# Altium PCB main.PcbDoc (part 11 of 16)
Units mil, origin at the board's own origin, x right, y up, seen from the top; angles counter-clockwise.
Board outline 8394.75 x 5164.44 mil, 7 copper layers (Top Layer 1, Layer 2, Layer 3, Unused, Layer 4_pow, Layer 5_gnd, Bottom 6+gnd), stack 64.043 mil thick; 364 components, 409 nets, 1932 pads, 1061 vias.
Unrouted connection lines stored in the file: 2.
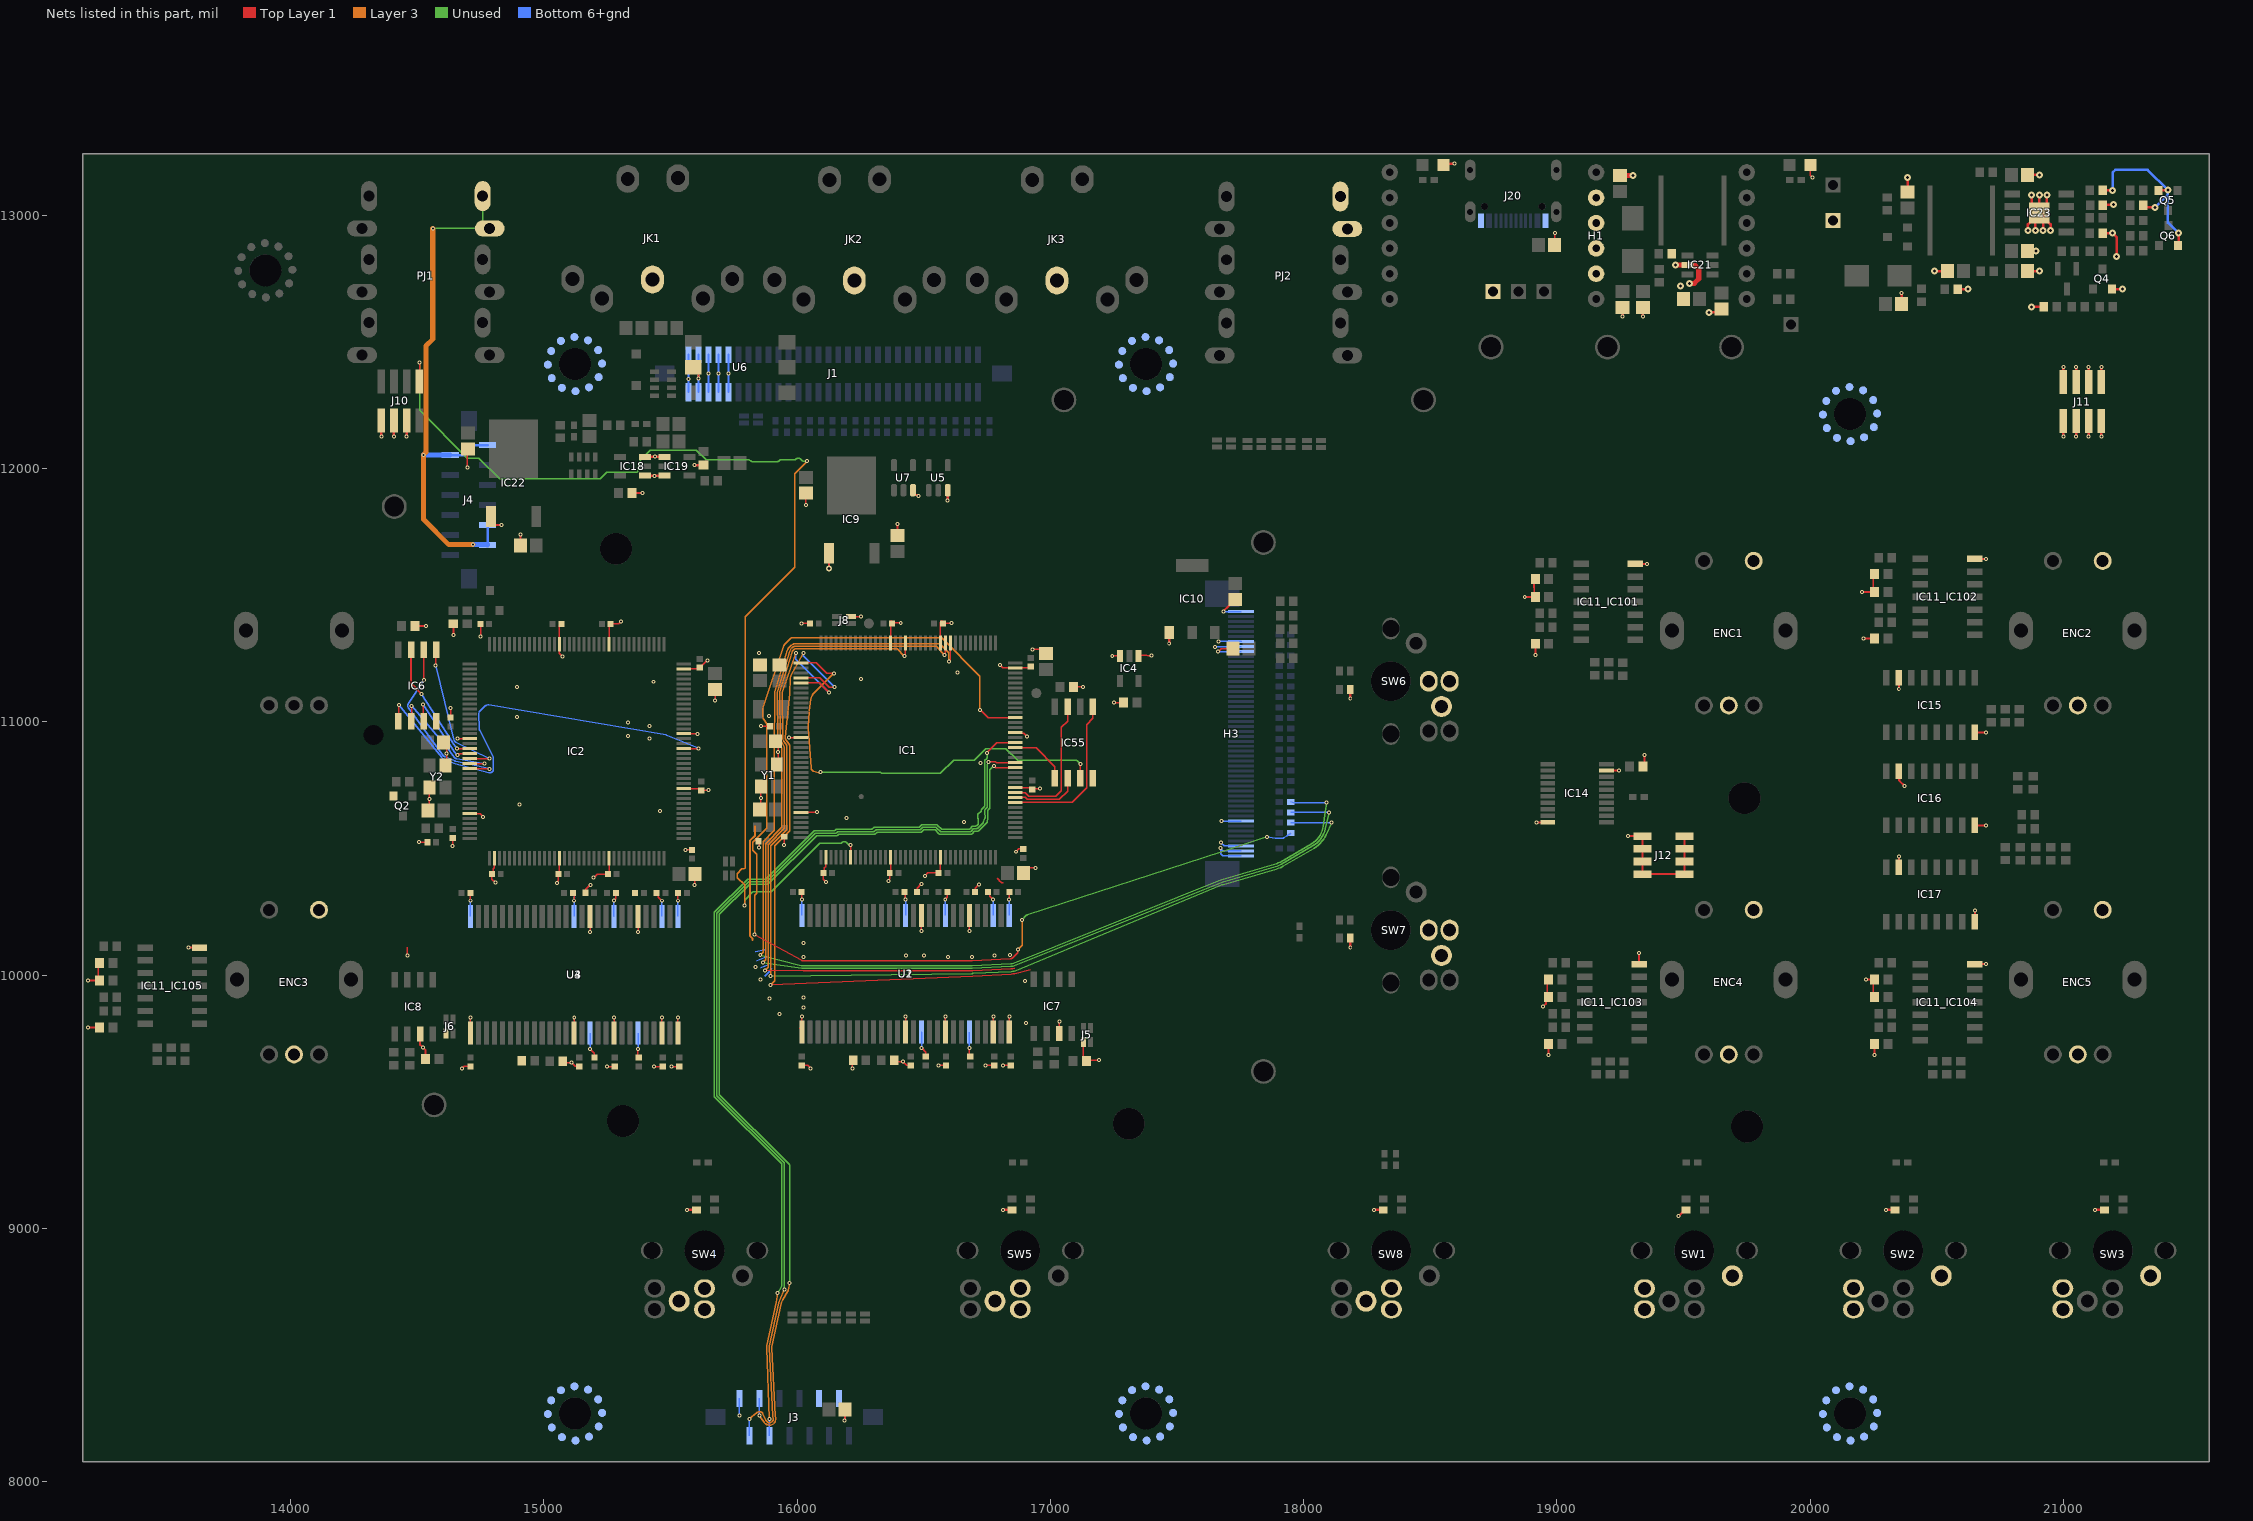
[diagram p14: the nets of this part, all layers, seen from the top]

## Via types
v1: diameter 15.75, hole 7.87, Top Layer 1 to Bottom 6+gnd, tented both sides, 961 vias
v2: diameter 27.56, hole 11.81, Top Layer 1 to Bottom 6+gnd, 45 vias
v3: diameter 23.62/23.62/23.62/23.62/23.62/23.62/23.62 (per signal layer), hole 12, Top Layer 1 to Bottom 6+gnd, tented top, 42 vias
v4: diameter 15.75, hole 7.87, Top Layer 1 to Bottom 6+gnd, 10 vias
v5: diameter 23.62/23.62/23.62/23.62/23.62/23.62/23.62 (per signal layer), hole 12, Top Layer 1 to Bottom 6+gnd, tented bottom, 3 vias

## Nets (pads, with @x,y where several pads share a name; then routed paths per layer and width w, separated by ;. In a path a pad name is that pad's centre, name@x,y a point inside that pad or via, vN(x,y) a via of type N, cw(c..) or ccw(c..) an arc to the next point about the centre after c; other vN are vias at no path point) (continued)
FLASH_CLK_7: IC2.22 IC6.6 | length 753
  Top Layer 1 w5: IC6.6@14525.77,11285.63 14525.77,11165.84 v1(14526.49,11165.12) ; IC2.22@14707.15,10815.73 14707.39,10815.49 14785.63,10815.49 v1(14785.86,10815.26)
  Bottom 6+gnd w5: v1(14526.49,11165.12) 14465.31,11072.28 ccw(c14478.15,11063.82) 14465.77,11054.71 14603.73,10867.17 ccw(c14616.11,10876.28) 14610.24,10862.08 14648.78,10846.14 ccw(c14658.48,10869.59) 14652.96,10844.82 14763.14,10820.25 ; 14763.18,10820.24 v1(14785.86,10815.26)
FLASH_CS_6: IC1.91 IC55.1 | length 235
  Top Layer 1 w5: IC1.91@16860.92,10898.65 16943.32,10898.65 17018.15,10823.82 IC55.1@17018.15,10777.09
FLASH_CS_7: IC2.91 IC6.1 | length 1752.3
  Top Layer 1 w5: IC6.1@14425.77,11002.16 14427.35,11003.74 v1(14427.35,11067.29) ; IC2.91@15552.67,10894.47 15553.06,10894.86 15611.09,10894.86 v1(15611.48,10895.26)
  Bottom 6+gnd w5: v1(14427.35,11067.29) 14596.46,10860.23 ccw(c14616.11,10876.28) 14606.42,10852.83 14644.96,10836.9 ccw(c14658.48,10869.59) 14649.45,10835.39 14781.94,10800.39 ccw(c14785.86,10815.26) 14801.24,10815.26 14801.23,10855.26 ccw(c14785.86,10855.26) 14799.58,10862.21 14746.14,10967.68 cw(c14759.85,10974.63) 14744.48,10974.27 14743.27,11032.34 cw(c14758.64,11032.66) 14748.25,11043.99 14769.39,11063.37 cw(c14779.77,11052.03) 14782.33,11067.19 15482.6,10948.9 cw(c15479.93,10933.76) 15485.87,10947.94 v1(15611.48,10895.26)
FLASH_D0_6: IC1.80 IC55.5 | length 637.8
  Top Layer 1 w5: IC1.80@16860.91,10682.13 17086.46,10682.13 17144.05,10739.71 17144.05,10989.71 17168.15,11013.82 IC55.5@17168.15,11060.55
FLASH_D0_7: IC2.20 IC6.5 | length 604.6
  Top Layer 1 w5: v1(14573.15,11223.82) 14573.15,11283.01 IC6.5@14575.77,11285.63 ; IC2.20@14707.15,10855.1 14707.23,10855.18 14785.78,10855.18 v1(14785.86,10855.26)
  Bottom 6+gnd w5: v1(14573.15,11223.82) 14645.07,10930.97 ccw(c14659.99,10934.67) 14653.18,10920.89 v1(14785.86,10855.26)
FLASH_D1_6: IC1.81 IC55.2 | length 274.5
  Top Layer 1 w5: IC1.81@16860.91,10701.81 16901.36,10701.81 16909.05,10694.12 17035.94,10694.12 17068.15,10726.33 IC55.2@17068.15,10777.09
FLASH_D1_7: IC2.21 IC6.2 | length 509.9
  Top Layer 1 w5: IC6.2@14475.77,11002.16 14478.15,11004.54 v1(14478.15,11063.82) ; IC2.21@14707.15,10835.42 14707.23,10835.34 14766.41,10835.34 v1(14766.48,10835.26)
  Bottom 6+gnd w5: v1(14478.15,11063.82) 14627.86,10886.19 cw(c14616.11,10876.28) 14628.67,10885.15 14645.92,10860.72 ccw(c14658.48,10869.59) 14655.85,10854.44 v1(14766.48,10835.26)
FLASH_D2_6: IC1.1 IC55.3 | length 1751.4
  Top Layer 1 w5: IC1.1@16015.39,11233.31 16074.77,11233.31 16116.24,11191.83 v1(16145.24,11191.83) ; IC55.3@17118.15,10777.09 17118.15,10834.31 v1(17118.23,10834.39)
  Unused w5: v1(16092.24,10801.51) 16326.62,10801.51 cw(c16326.62,10796.51) 16330.14,10800.06 16331.56,10798.64 ccw(c16335.07,10802.2) 16335.07,10797.2 16564.46,10797.2 ccw(c16564.46,10802.2) 16567.98,10798.65 16616.4,10847.07 cw(c16619.92,10843.51) 16619.92,10848.51 16695.54,10848.51 ccw(c16695.54,10853.51) 16698.62,10849.58 16706.94,10856.09 ccw(c16703.86,10860.03) 16707.38,10856.48 16743.27,10892.37 cw(c16746.79,10888.82) 16746.79,10893.82 16822.94,10893.82 cw(c16822.94,10888.82) 16826.46,10892.37 16869.35,10849.97 ccw(c16872.88,10853.51) 16872.88,10848.51 17102.04,10848.51 cw(c17102.04,10843.51) 17105.57,10847.05 v1(17118.23,10834.39)
  Layer 3 w5: 16048.08,11041.22 16043.91,10981.06 ccw(c16079.21,10978.64) 16043.92,10976.15 16055.02,10818.72 ccw(c16070.35,10819.85) 16065.59,10805.23 16090.24,10797.2 16090.24,10799.5 v1(16092.24,10801.51) ; 16048.32,11043.65 16054.06,11090.1 cw(c16089.16,11085.73) 16064.1,11110.69 v1(16145.24,11191.83)
FLASH_D2_7: IC2.19 IC6.3 | length 364.3
  Top Layer 1 w5: v1(14523.15,11068.82) 14523.15,11004.79 IC6.3@14525.77,11002.16 ; v1@14656.02,10864.22 14666.59,10874.79 IC2.19@14707.15,10874.79
  Bottom 6+gnd w5: v1(14523.15,11068.82) 14643.66,10886.77 ccw(c14656.48,10895.26) 14644.9,10885.15 v1(14658.48,10869.59)
FLASH_D3_6: IC1.82 IC55.7 | length 539.2
  Top Layer 1 w5: IC1.82@16860.91,10721.5 16900.95,10721.5 16915.24,10707.2 17021.54,10707.2 17043.15,10728.82 17043.15,10978.82 17068.15,11003.82 IC55.7@17068.15,11060.55
FLASH_D3_7: IC2.18 IC6.7 | length 499.7
  Top Layer 1 w5: v1(14656.48,10895.26) 14656.88,10894.86 14706.76,10894.86 IC2.18@14707.15,10894.47
  Top Layer 1 w8: IC6.7@14475.77,11285.63 14475.77,11151.91 v1(14516.58,11111.09)
  Bottom 6+gnd w5: v1(14516.58,11111.09) 14638.64,10920.97 ccw(c14659.99,10934.67) 14639.16,10920.2 v1(14656.48,10895.26)
FMC_A21_RS: IC1.4 | length 2737
  Top Layer 1 w5: v1(15895.24,9962.2) 16693.51,9996.9 ; IC1.4@16015.39,11174.25 16089.27,11174.25 16126.03,11137.5 v1(16148.55,11137.5) ; 16921.06,10021.37 ccw(c16922.44,10014) 16920.68,10021.29 16858.7,10006.66 cw(c16841.4,10080.02) 16845.35,10004.75 16694.1,9996.93 ; 16693.51,9996.9 ccw(c16690.24,10072.2) 16694.1,9996.93 ; 16693.51,9996.9 ccw(c16690.24,10072.2) 16694.1,9996.93 ; 16693.51,9996.9 ccw(c16690.24,10072.2) 16694.1,9996.93 ; 16693.51,9996.9 ccw(c16690.24,10072.2) 16694.1,9996.93 ; 16693.51,9996.9 ccw(c16690.24,10072.2) 16694.1,9996.93 ; 16693.51,9996.9 ccw(c16690.24,10072.2) 16694.1,9996.93 ; 16693.51,9996.9 ccw(c16690.24,10072.2) 16694.1,9996.93 ; 16693.51,9996.9 ccw(c16690.24,10072.2) 16694.1,9996.93 ; 16693.51,9996.9 ccw(c16690.24,10072.2) 16694.1,9996.93 ; 16693.51,9996.9 ccw(c16690.24,10072.2) 16694.1,9996.93 ; 16693.51,9996.9 ccw(c16690.24,10072.2) 16694.1,9996.93 ; 16693.51,9996.9 ccw(c16690.24,10072.2) 16694.1,9996.93 ; 16693.51,9996.9 ccw(c16690.24,10072.2) 16694.1,9996.93 ; 16693.51,9996.9 ccw(c16690.24,10072.2) 16694.1,9996.93 ; 16693.51,9996.9 ccw(c16690.24,10072.2) 16694.1,9996.93 ; 16693.51,9996.9 ccw(c16690.24,10072.2) 16694.1,9996.93
  Layer 3 w5: v1(15895.24,9962.2) 15910.95,9977.91 15910.95,10512.06 15970.02,10571.13 15970.02,10908.63 ; 15955.72,10929.76 cw(c15968.15,10938.82) 15952.87,10940.49 15971.72,11110.57 ccw(c15956.45,11112.31) 15971.81,11111.82 ; 15955.73,10929.76 15969.06,10911.54 cw(c15965.02,10908.59) 15970.02,10908.68 ; v1(16025.24,11272.2) 15975.68,11182.21 ccw(c15988.83,11175) 15973.84,11175.47 15971.81,11111.82 ; 15971.72,11110.58 ccw(c15956.45,11112.31) 15971.81,11111.82 ; 15971.72,11110.58 ccw(c15956.45,11112.31) 15971.81,11111.82 ; 15971.72,11110.58 ccw(c15956.45,11112.31) 15971.81,11111.82 ; 15971.72,11110.58 ccw(c15956.45,11112.31) 15971.81,11111.82
  Bottom 6+gnd w5: v1(16025.24,11272.2) 16025.24,11260.81 v1(16148.55,11137.5)
FMC_A22_RS: IC1.5 R41.2 | length 4455.2
  Top Layer 1 w5: IC1.5@16015.39,11154.57 16087.87,11154.57 v1(16125.24,11117.2)
  Unused w5: v1(15894.56,9996.73) 16691.14,10006.84 ; 16691.18,10006.84 16693.55,10006.92 ccw(c16693.37,10011.91) 16693.61,10006.92 16844.77,10014.74 ccw(c16841.4,10080.02) 16863.51,10018.51 ccw(c16860.09,10027.9) 16863.92,10018.67 17671.85,10354.46 cw(c17710.04,10262.58) 17682.39,10358.16 17891.09,10418.54 ccw(c17859.4,10529.09) 17917.24,10429.69 18041.72,10502.34 ccw(c17983.57,10601.98) 18088.49,10553.99 v1(18110.55,10602.23)
  Layer 3 w5: v1(15894.56,9996.73) 15895.57,9997.75 15895.57,10510.82 15960.02,10575.27 15960.02,10904.54 ; 15941.9,11117.27 v1(15995.24,11272.2) ; 15941.9,11117.28 ccw(c15956.45,11112.31) 15941.07,11112.17 15942.78,10938.64 ; 15942.78,10938.64 ccw(c15968.15,10938.82) 15947.31,10924.34 ; 15942.78,10938.64 ccw(c15968.15,10938.82) 15947.31,10924.34 ; 15942.78,10938.64 ccw(c15968.15,10938.82) 15947.31,10924.34 ; 15942.78,10938.64 ccw(c15968.15,10938.82) 15947.31,10924.34 ; 15942.78,10938.64 ccw(c15968.15,10938.82) 15947.31,10924.34 ; 15942.78,10938.64 ccw(c15968.15,10938.82) 15947.31,10924.34 ; 15942.78,10938.64 ccw(c15968.15,10938.82) 15947.31,10924.34 ; 15942.78,10938.64 ccw(c15968.15,10938.82) 15947.31,10924.34 ; 15942.78,10938.64 ccw(c15968.15,10938.82) 15947.31,10924.34 ; 15942.78,10938.64 ccw(c15968.15,10938.82) 15947.31,10924.34 ; 15942.78,10938.64 ccw(c15968.15,10938.82) 15947.31,10924.34 ; 15942.78,10938.64 ccw(c15968.15,10938.82) 15947.31,10924.34 ; 15942.78,10938.64 ccw(c15968.15,10938.82) 15947.31,10924.34 ; 15942.78,10938.64 ccw(c15968.15,10938.82) 15947.31,10924.34 ; 15942.78,10938.64 ccw(c15968.15,10938.82) 15947.31,10924.34 ; 15942.78,10938.64 ccw(c15968.15,10938.82) 15947.31,10924.34 ; 15947.32,10924.33 15959.13,10907.3 ; 15959.13,10907.3 cw(c15955.02,10904.45) 15960.02,10904.54 ; 15959.13,10907.3 cw(c15955.02,10904.45) 15960.02,10904.54 ; 15959.13,10907.3 cw(c15955.02,10904.45) 15960.02,10904.54 ; 15959.13,10907.3 cw(c15955.02,10904.45) 15960.02,10904.54 ; 15959.13,10907.3 cw(c15955.02,10904.45) 15960.02,10904.54 ; 15959.13,10907.3 cw(c15955.02,10904.45) 15960.02,10904.54 ; 15959.13,10907.3 cw(c15955.02,10904.45) 15960.02,10904.54 ; 15959.13,10907.3 cw(c15955.02,10904.45) 15960.02,10904.54 ; 15959.13,10907.3 cw(c15955.02,10904.45) 15960.02,10904.54 ; 15959.13,10907.3 cw(c15955.02,10904.45) 15960.02,10904.54 ; 15959.13,10907.3 cw(c15955.02,10904.45) 15960.02,10904.54 ; 15959.13,10907.3 cw(c15955.02,10904.45) 15960.02,10904.54 ; 15959.13,10907.3 cw(c15955.02,10904.45) 15960.02,10904.54 ; 15959.13,10907.3 cw(c15955.02,10904.45) 15960.02,10904.54 ; 15959.13,10907.3 cw(c15955.02,10904.45) 15960.02,10904.54 ; 15959.13,10907.3 cw(c15955.02,10904.45) 15960.02,10904.54
  Bottom 6+gnd w5: v1(15995.24,11272.2) 15995.24,11247.2 v1(16125.24,11117.2) ; R41.2@17948.43,10602.19 17960.69,10602.23 v1(18110.55,10602.23)
FMC_NE1_CS: IC1.97 R40.2 | length 4660.8
  Top Layer 1 w5: v1(15832.36,10160.4) 16017.9,10058.69 ccw(c16025.24,10072.2) 16025.24,10056.83 16690.24,10056.83 ; 16691,10056.85 16842.19,10064.67 ccw(c16841.4,10080.02) 16849.78,10067.14 16871.44,10088.79 16871.44,10100.64 v1(16871.26,10100.81) ; v1(16723.12,11047.47) 16753.81,11016.77 IC1.97@16860.91,11016.77
  Unused w5: v1(16888.15,10218.82) 16901.98,10234.16 cw(c16913.4,10223.87) 16908.71,10238.51 17676.81,10487.18 ccw(c17672.07,10501.81) 17676.89,10487.21 v1(17855.01,10545.99)
  Layer 3 w5: v1(15832.36,10160.4) 15832.36,10316.32 15840.24,10324.2 15840.24,10477.2 15824.82,10492.62 15824.82,10525.93 15880.24,10581.35 15880.24,10990.13 ccw(c15875.24,10990.13) 15879.46,10992.81 15868.44,11010.17 cw(c15889.86,11023.77) 15864.49,11023.77 15864.49,11052.2 cw(c15889.86,11052.2) 15865.8,11060.27 15942.73,11289.8 cw(c15995.24,11272.2) 15956,11311.28 15975.48,11330.76 cw(c15979,11327.2) 15979,11332.2 16571.19,11332.2 16721.91,11181.49 16721.91,11048.67 v1(16723.12,11047.47) ; v1(16871.26,10100.81) 16888.15,10117.69 v1(16888.15,10218.82)
  Bottom 6+gnd w5: v1(17855.01,10545.99) 17887.39,10541.63 ccw(c17888.39,10549.06) 17888.39,10541.56 17917.91,10541.56 ccw(c17917.91,10549.06) 17921.87,10542.69 17936.16,10551.56 R40.2@17948.43,10560.87
FMC_NE4_CS: IC1.127 | length 2802.7
  Top Layer 1 w5: v1(15873.39,10019.05) 16024.42,10016.84 ccw(c16025.24,10072.2) 16025.24,10016.83 16690.24,10016.83 ccw(c16690.24,10072.2) 16693.05,10016.9 16844.28,10024.73 ccw(c16841.4,10080.02) 16860.09,10027.9 ; v1(16424,11259.98) 16426.05,11262.04 16426.05,11309.32 IC1.127@16428.31,11311.57
  Layer 3 w5: v1(15873.39,10019.05) 15885.57,10031.23 15885.57,10514.96 15950.02,10579.41 15950.02,10900.35 ; 15931.07,11112.09 cw(c15956.45,11112.31) 15932.18,11119.72 ; 15931.08,11112.09 15932.78,10938.49 ccw(c15968.15,10938.82) 15938.47,10919.57 15949.21,10903.03 cw(c15945.02,10900.31) 15950.02,10900.39 ; 15932.18,11119.73 15980.54,11276.73 cw(c15995.24,11272.2) 15984.43,11283.14 15988.13,11286.84 cw(c15991.69,11283.28) 15991.6,11288.28 16395.69,11288.28 v1(16424,11259.98)
FMC_NOE_RD: IC1.118 R55.2 | length 4606.7
  Top Layer 1 w5: v1(16600.63,11238.48) 16600.63,11241.39 16605.47,11246.23 IC1.118@16605.47,11311.57
  Unused w5: v1(15854.52,10079.87) 16016.37,10037.96 ccw(c16025.24,10072.2) 16025.24,10036.83 16690.24,10036.83 ccw(c16690.24,10072.2) 16692.04,10036.88 16843.25,10044.7 ccw(c16841.4,10080.02) 16854.62,10047.21 17665.44,10373.44 cw(c17710.04,10262.58) 17676.83,10377.37 17885.43,10437.72 ccw(c17859.4,10529.09) 17907.27,10447.03 18031.64,10519.61 ccw(c17983.57,10601.98) 18078.08,10589.22 18085.57,10644.65 v1(18090.6,10681.8)
  Layer 3 w5: v1(15854.52,10079.87) 15865.57,10090.92 15865.57,10527.54 15907.81,10569.77 ; 15907.83,10569.8 ccw(c15904.24,10573.28) 15909.24,10573.28 15909.27,10880.47 cw(c15924.65,10880.47) 15909.27,10880.55 15911.08,11112.66 cw(c15956.45,11112.31) 15913.08,11125.65 15961.43,11282.62 cw(c15995.24,11272.2) 15970.17,11297.17 15974.02,11301.01 cw(c15991.64,11283.28) 15991.64,11308.28 16564.16,11308.28 16599.54,11272.9 16599.54,11239.57 v1(16600.63,11238.48)
  Bottom 6+gnd w5: R55.2@17948.43,10684.82 17960.69,10681.98 17983.57,10681.98 ; 17983.79,10681.8 v1(18090.6,10681.8)
FMC_NWE_WE: IC1.119 R54.2 | length 4928.7
  Top Layer 1 w5: v1(16582.9,11264.24) 16584.34,11265.68 16584.34,11310.13 IC1.119@16585.79,11311.57
  Unused w5: v1(15864.89,10049.65) 16018.71,10027.3 ccw(c16025.24,10072.2) 16025.24,10026.83 16690.24,10026.83 ccw(c16690.24,10072.2) 16692.52,10026.89 16843.74,10034.71 ccw(c16841.4,10080.02) 16858.32,10037.93 17669.17,10364.16 cw(c17710.04,10262.58) 17679.61,10367.76 17888.26,10428.13 ccw(c17859.4,10529.09) 17912.31,10438.4 18036.68,10510.97 ccw(c17983.57,10601.98) 18086.34,10578.71 v1(18100.81,10642.59)
  Layer 3 w5: v1(15864.89,10049.65) 15875.57,10060.33 15875.57,10519.11 15940.02,10583.56 15940.02,10896.25 ; v1(16582.9,11264.24) 16548.86,11298.28 15991.64,11298.28 ; 15939.29,10898.77 cw(c15935.02,10896.16) 15940.02,10896.25 ; 15939.29,10898.77 cw(c15935.02,10896.16) 15940.02,10896.25 ; 15939.29,10898.77 cw(c15935.02,10896.16) 15940.02,10896.25 ; 15939.29,10898.77 cw(c15935.02,10896.16) 15940.02,10896.25 ; 15939.29,10898.77 cw(c15935.02,10896.16) 15940.02,10896.25 ; 15939.29,10898.77 cw(c15935.02,10896.16) 15940.02,10896.25 ; 15939.29,10898.77 cw(c15935.02,10896.16) 15940.02,10896.25 ; 15939.29,10898.77 cw(c15935.02,10896.16) 15940.02,10896.25 ; 15939.29,10898.77 cw(c15935.02,10896.16) 15940.02,10896.25 ; 15939.29,10898.77 cw(c15935.02,10896.16) 15940.02,10896.25 ; 15939.29,10898.77 cw(c15935.02,10896.16) 15940.02,10896.25 ; 15939.29,10898.77 cw(c15935.02,10896.16) 15940.02,10896.25 ; 15939.29,10898.77 cw(c15935.02,10896.16) 15940.02,10896.25 ; 15939.29,10898.77 cw(c15935.02,10896.16) 15940.02,10896.25 ; 15939.29,10898.77 cw(c15935.02,10896.16) 15940.02,10896.25 ; 15939.29,10898.77 cw(c15935.02,10896.16) 15940.02,10896.25 ; 15939.29,10898.77 15929.25,10915.46 cw(c15968.15,10938.82) 15922.78,10938.37 15921.08,11111.96 cw(c15956.45,11112.31) 15922.64,11122.72 15970.99,11279.67 ; 15970.99,11279.67 cw(c15995.24,11272.2) 15977.26,11290.11 ; 15970.99,11279.67 cw(c15995.24,11272.2) 15977.26,11290.11 ; 15970.99,11279.67 cw(c15995.24,11272.2) 15977.26,11290.11 ; 15970.99,11279.67 cw(c15995.24,11272.2) 15977.26,11290.11 ; 15970.99,11279.67 cw(c15995.24,11272.2) 15977.26,11290.11 ; 15970.99,11279.67 cw(c15995.24,11272.2) 15977.26,11290.11 ; 15970.99,11279.67 cw(c15995.24,11272.2) 15977.26,11290.11 ; 15970.99,11279.67 cw(c15995.24,11272.2) 15977.26,11290.11 ; 15970.99,11279.67 cw(c15995.24,11272.2) 15977.26,11290.11 ; 15970.99,11279.67 cw(c15995.24,11272.2) 15977.26,11290.11 ; 15970.99,11279.67 cw(c15995.24,11272.2) 15977.26,11290.11 ; 15970.99,11279.67 cw(c15995.24,11272.2) 15977.26,11290.11 ; 15970.99,11279.67 cw(c15995.24,11272.2) 15977.26,11290.11 ; 15970.99,11279.67 cw(c15995.24,11272.2) 15977.26,11290.11 ; 15970.99,11279.67 cw(c15995.24,11272.2) 15977.26,11290.11 ; 15970.99,11279.67 cw(c15995.24,11272.2) 15977.26,11290.11 ; 15977.26,11290.11 15981.07,11293.93 ; 15981.07,11293.93 cw(c15991.64,11283.28) 15991.64,11298.28 ; 15981.07,11293.93 cw(c15991.64,11283.28) 15991.64,11298.28 ; 15981.07,11293.93 cw(c15991.64,11283.28) 15991.64,11298.28 ; 15981.07,11293.93 cw(c15991.64,11283.28) 15991.64,11298.28 ; 15981.07,11293.93 cw(c15991.64,11283.28) 15991.64,11298.28 ; 15981.07,11293.93 cw(c15991.64,11283.28) 15991.64,11298.28 ; 15981.07,11293.93 cw(c15991.64,11283.28) 15991.64,11298.28 ; 15981.07,11293.93 cw(c15991.64,11283.28) 15991.64,11298.28 ; 15981.07,11293.93 cw(c15991.64,11283.28) 15991.64,11298.28 ; 15981.07,11293.93 cw(c15991.64,11283.28) 15991.64,11298.28 ; 15981.07,11293.93 cw(c15991.64,11283.28) 15991.64,11298.28 ; 15981.07,11293.93 cw(c15991.64,11283.28) 15991.64,11298.28 ; 15981.07,11293.93 cw(c15991.64,11283.28) 15991.64,11298.28 ; 15981.07,11293.93 cw(c15991.64,11283.28) 15991.64,11298.28 ; 15981.07,11293.93 cw(c15991.64,11283.28) 15991.64,11298.28 ; 15981.07,11293.93 cw(c15991.64,11283.28) 15991.64,11298.28
  Bottom 6+gnd w5: R54.2@17948.43,10643.5 17960.69,10642.59 v1(18100.81,10642.59)
FOOT1: IC1.92 J3.4 | length 3811.1
  Top Layer 1 w5: v1(16749.9,10877.25) 16749.9,10880.75 16787.5,10918.35 IC1.92@16860.91,10918.35
  Unused w5: v1(15923.12,8745.27) 15939.46,8772.9 ccw(c15935.15,8775.43) 15940.15,8775.43 15940.15,9252.08 ccw(c15935.15,9252.08) 15938.7,9255.6 15673.6,9520.7 cw(c15677.15,9524.22) 15672.15,9524.22 15672.15,10244.78 cw(c15677.15,10244.78) 15673.6,10248.3 15802.85,10377.55 cw(c15806.37,10374) 15806.37,10379 15874.24,10379 ccw(c15874.24,10384) 15877.76,10380.45 16067.03,10569.71 cw(c16070.55,10566.16) 16070.55,10571.16 16146.54,10571.16 ccw(c16146.54,10576.16) 16150.06,10572.61 16152.31,10574.87 cw(c16155.83,10571.31) 16155.83,10576.31 16293.39,10576.31 ccw(c16293.39,10581.31) 16296.91,10577.76 16301.89,10582.74 cw(c16305.41,10579.19) 16305.41,10584.19 16480.99,10584.19 ccw(c16480.99,10589.19) 16484.51,10585.64 16492.48,10593.62 cw(c16496,10590.06) 16496,10595.06 16549.68,10595.06 cw(c16549.68,10590.06) 16553.11,10593.71 16556,10590.99 cw(c16545.72,10580.06) 16556.28,10590.72 16568.54,10578.45 ccw(c16572.07,10582) 16572.07,10577 16679.23,10577 ccw(c16679.23,10582) 16682.75,10578.45 16692.05,10587.74 cw(c16695.57,10584.19) 16695.57,10589.19 16704.99,10589.19 ccw(c16704.99,10594.19) 16708.51,10590.64 16714.7,10596.84 ccw(c16711.15,10600.36) 16716.15,10600.36 16716.15,10614.65 ccw(c16711.15,10614.63) 16714.71,10618.14 16713.77,10619.09 cw(c16717.34,10622.59) 16712.34,10622.59 16712.34,10631.18 cw(c16717.34,10631.18) 16713.79,10634.7 16726.19,10647.1 ccw(c16722.63,10650.62) 16727.63,10650.62 16727.63,10651.87 cw(c16732.63,10651.87) 16729.08,10655.39 16738.74,10665.04 ccw(c16735.19,10668.56) 16740.19,10668.56 16740.19,10845.33 cw(c16745.19,10845.33) 16741.64,10848.85 16748.45,10855.66 ccw(c16744.9,10859.18) 16749.9,10859.18 v1(16749.9,10877.25)
  Layer 3 w5: v1(15890.67,8248.69) 15879.65,8528.6 cw(c15915,8530) 15880.44,8537.53 15917.53,8707.81 ; 15917.53,8707.84 ccw(c15912.64,8708.86) 15917.59,8708.13 v1(15923.12,8745.27)
  Bottom 6+gnd w5: J3.4@15890.55,8181.18 15890.55,8233.03 15890.67,8233.15 v1(15890.67,8248.69)
FOOT2: IC1.88 J3.2 | length 3882.2
  Top Layer 1 w5: v1(16755.56,10841.03) 16756.9,10842.37 16783.52,10842.37 16786.28,10839.61 IC1.88@16860.91,10839.61
  Unused w5: v1(15949.77,8759.89) 15950.15,8775.08 ccw(c15935.15,8775.43) 15950.15,8775.43 15950.15,9256.22 ccw(c15945.15,9256.22) 15948.7,9259.74 15683.6,9524.84 cw(c15687.15,9528.36) 15682.15,9528.36 15682.15,10240.64 cw(c15687.15,10240.64) 15683.6,10244.16 15806.99,10367.55 cw(c15810.51,10364) 15810.51,10369 15878.38,10369 ccw(c15878.38,10374) 15881.9,10370.45 16071.17,10559.71 cw(c16074.69,10556.16) 16074.69,10561.16 16152.1,10561.16 ccw(c16152.1,10566.16) 16155.62,10562.61 16157.87,10564.87 cw(c16161.39,10561.31) 16161.39,10566.31 16301.25,10566.31 ccw(c16301.25,10571.31) 16304.77,10567.76 16309.75,10572.74 cw(c16313.27,10569.19) 16313.27,10574.19 16485.13,10574.19 ccw(c16485.13,10579.19) 16488.65,10575.64 16496.62,10583.62 cw(c16500.14,10580.06) 16500.14,10585.06 16545.54,10585.06 cw(c16545.54,10580.06) 16548.97,10583.71 16551.86,10580.99 cw(c16541.57,10570.06) 16552.19,10580.66 16564.4,10568.45 ccw(c16567.92,10572) 16567.92,10567 16683.38,10567 ccw(c16683.38,10572) 16686.9,10568.45 16696.19,10577.74 cw(c16699.71,10574.19) 16699.71,10579.19 16709.13,10579.19 ccw(c16709.13,10584.19) 16712.65,10580.64 16734.71,10602.7 ccw(c16731.16,10606.22) 16735.85,10604.49 16741.48,10619.53 ccw(c16736.81,10621.32) 16741.57,10619.77 16742.34,10622.15 ccw(c16727.71,10626.89) 16742.9,10629.27 16741.87,10635.84 cw(c16746.81,10636.59) 16741.81,10636.56 16741.81,10651.9 cw(c16746.81,10651.9) 16743.26,10655.42 16748.74,10660.9 ccw(c16745.19,10664.42) 16750.19,10664.42 16750.19,10830.68 cw(c16755.19,10830.68) 16750.9,10833.25 v1(16755.56,10841.03)
  Layer 3 w5: v1(15811.93,8248.69) 15841.21,8273.11 cw(c15851.06,8261.31) 15865.04,8267.71 15876.69,8242.28 ccw(c15890.67,8248.69) 15905.79,8251.47 15904.83,8256.81 cw(c15929.8,8261.31) 15904.47,8259.91 15889.66,8528.59 cw(c15915,8530) 15890.21,8535.4 15927.47,8706.47 cw(c15981.58,8694.69) 15930.88,8716.95 v1(15949.77,8759.89)
  Bottom 6+gnd w5: J3.2@15811.81,8181.18 15811.81,8233.03 15811.93,8233.15 v1(15811.93,8248.69)
FOOT3: IC1.87 J3.3 | length 3821.7
  Top Layer 1 w5: v1(16777.15,10827) 16784.23,10819.92 IC1.87@16860.91,10819.92
  Unused w5: v1(15970.44,8785) 15970.44,9250.07 ccw(c15965.44,9250.07) 15968.99,9253.59 15693.6,9528.98 cw(c15697.15,9532.5) 15692.15,9532.5 15692.15,10236.5 cw(c15697.15,10236.5) 15693.6,10240.02 15811.13,10357.55 cw(c15814.65,10354) 15814.65,10359 15882.53,10359 ccw(c15882.53,10364) 15886.05,10360.45 16075.09,10549.49 cw(c16078.61,10545.94) 16078.61,10550.94 16156.02,10550.94 ccw(c16156.02,10555.94) 16159.54,10552.39 16162.02,10554.87 cw(c16165.54,10551.31) 16165.54,10556.31 16305.39,10556.31 ccw(c16305.39,10561.31) 16308.91,10557.76 16313.89,10562.74 cw(c16317.41,10559.19) 16317.41,10564.19 16489.27,10564.19 ccw(c16489.27,10569.19) 16492.79,10565.64 16500.77,10573.62 cw(c16504.29,10570.06) 16504.29,10575.06 16541.57,10575.06 cw(c16541.57,10570.06) 16545.09,10573.62 16560.26,10558.45 ccw(c16563.78,10562) 16563.78,10557 16687.52,10557 ccw(c16687.52,10562) 16691.04,10558.45 16700.33,10567.74 cw(c16703.85,10564.19) 16703.85,10569.19 16713.27,10569.19 ccw(c16713.27,10574.19) 16716.79,10570.64 16750.36,10604.21 ccw(c16746.81,10607.73) 16751.78,10607.14 16753.05,10617.85 ccw(c16748.09,10618.44) 16753.09,10618.44 16753.09,10635.27 ccw(c16748.09,10635.27) 16752.99,10636.27 16752.14,10640.41 cw(c16767.21,10643.47) 16752.55,10648.1 16753.32,10650.54 cw(c16758.09,10649.03) 16754.53,10652.55 16758.74,10656.76 ccw(c16755.19,10660.28) 16760.19,10660.28 16760.19,10807.97 cw(c16765.19,10807.97) 16761.64,10811.49 v1(16777.15,10827)
  Layer 3 w5: v1(15851.06,8261.31) 15869.81,8234.24 ccw(c15890.67,8248.69) 15915.64,8253.19 15914.67,8258.58 cw(c15929.8,8261.31) 15914.45,8260.51 15899.65,8529.12 cw(c15915,8530) 15899.98,8533.27 15937.24,8704.35 15937.27,8704.45 cw(c15981.58,8694.69) 15942.63,8717.96 15962.97,8752.01 ccw(c15949.77,8759.89) 15964.84,8756.84 v1@15970.34,8784.01
  Bottom 6+gnd w5: v1(15851.06,8261.31) 15851.06,8276.85 15851.18,8276.97 J3.3@15851.18,8328.82
GND: C1.2 C2.2 C3.1 C4.1 C5.1 C6.1 C7.1 C8.1 C9.1 C10.1 C11.2 C12.2 C13.2 C14.2 C15.2 C16.2 C17.2 C18.2 C19.2 C20.2 C21.2 C22.2 C23.2 C24.2 C25.2 C26.2 C27.2 C28.2 C29.2 C30.2 C31.2 C32.2 C33.2 C34.2 C35.2 C36.2 C37.2 C38.2 C39.2 C40.2 C41.2 C42.2 C43.2 C44.2 C45.2 C46.2 C47.2 C48.2 C49.2 C50.2 C51.2 C52.2 C53.2 C54.2 C55.2 C56.2 C57.2 C58.2 C59.2 C60.2 C61.2 C63.1 C64.1 C65.1 C67.1 C68.1 C69.1 C70.1 C71.1 C72.1 C73.1 C74.1 C75.1 C76.1 C77_IC101.2 C77_IC102.2 C77_IC103.2 C77_IC104.2 C77_IC105.2 C78_IC101.2 C78_IC102.2 C78_IC103.2 C78_IC104.2 C78_IC105.2 C79_IC101.2 C79_IC102.2 C79_IC103.2 C79_IC104.2 C79_IC105.2 C80.2 C81.2 C85.1 C86.1 C87.1 C88.1 C89.1 C90.1 C91.1 C92.1 C93.1 C94.1 C95.1 C96.1 C97.1 D4.2 D5.2 ENC1.2 ENC1.C ENC2.2 ENC2.C ENC3.2 ENC3.C ENC4.2 ENC4.C ENC5.2 ENC5.C H1.2 H1.3 H1.4 H1.5 H3.1 H3.2 H3.3 H3.8 H3.42 H3.43 H3.44 H3.50 IC1.16 IC1.31 IC1.38 IC1.51 IC1.61 IC1.83 IC1.94 IC1.107 IC1.120 IC1.130 IC2.16 IC2.31 IC2.38 IC2.51 IC2.61 IC2.83 IC2.94 IC2.107 IC2.120 IC2.130 IC4.1 IC4.3 IC6.4 IC7.7 IC8.7 IC9.1 IC10.1 IC11_IC101.7 IC11_IC102.7 IC11_IC103.7 IC11_IC104.7 IC11_IC105.7 IC14.10 IC14.19 IC15.8 IC15.15 IC16.8 IC16.15 IC17.8 IC17.15 IC18.1 IC18.3 IC19.1 IC19.3 IC21.2 IC22.1 IC23.9 IC55.4 J1.51 J1.52 J1.53 J1.54 J1.55 J1.56 J1.57 J1.58 J1.59 J1.60 J3.1 J3.9 J3.11 J5.3 J6.3 J8.2 J10.4 J10.6 J10.8 J11.1 J11.2 J11.3 J11.4 J11.5 J11.6 J11.7 J11.8 J12.1 J12.2 J12.3 J12.4 J12.5 J12.6 J12.7 J12.8 J20.A1B12 J20.B1A12 JK1.2 JK2.2 JK3.2 pad.8@15015.87,12410.85 pad.8@15015.98,8267.55 pad.8@15029.12,12464.65 pad.8@15029.23,8321.35 pad.8@15031.29,12357.63 pad.8@15031.41,8214.33 pad.8@15067.49,12504.62 pad.8@15067.61,8361.32 pad.8@15071.26,12319.26 pad.8@15071.37,8175.96 pad.8@15120.71,12520.04 pad.8@15120.83,8376.74 pad.8@15125.06,12306.01 pad.8@15125.17,8162.71 pad.8@15174.51,12506.79 pad.8@15174.63,8363.49 pad.8@15178.28,12321.43 pad.8@15178.39,8178.13 pad.8@15214.48,12468.42 pad.8@15214.59,8325.12 pad.8@15216.65,12361.4 pad.8@15216.77,8218.1 pad.8@15229.9,12415.2 pad.8@15230.02,8271.9 pad.8@17270.68,12410.85 pad.8@17270.98,8267.83 pad.8@17283.93,12464.65 pad.8@17284.23,8321.63 pad.8@17286.1,12357.63 pad.8@17286.41,8214.61 pad.8@17322.3,12504.62 pad.8@17322.61,8361.59 pad.8@17326.07,12319.26 pad.8@17326.37,8176.23 pad.8@17375.52,12520.04 pad.8@17375.83,8377.02 pad.8@17379.87,12306.01 pad.8@17380.17,8162.98 pad.8@17429.32,12506.79 pad.8@17429.63,8363.77 pad.8@17433.09,12321.43 pad.8@17433.39,8178.41 pad.8@17469.29,12468.42 pad.8@17469.59,8325.39 pad.8@17471.46,12361.4 pad.8@17471.77,8218.37 pad.8@17484.71,12415.2 pad.8@17485.02,8272.17 pad.8@20050.46,8267.55 pad.8@20050.46,12213.55 pad.8@20063.71,8321.35 pad.8@20063.71,12267.35 pad.8@20065.89,8214.33 pad.8@20065.89,12160.33 pad.8@20102.09,8361.32 pad.8@20102.09,12307.31 pad.8@20105.86,8175.96 pad.8@20105.86,12121.95 pad.8@20155.31,8376.74 pad.8@20155.31,12322.74 pad.8@20159.66,8162.71 pad.8@20159.66,12108.7 pad.8@20209.11,8363.49 pad.8@20209.11,12309.49 pad.8@20212.87,8178.13 pad.8@20212.87,12124.13 pad.8@20249.07,8325.12 pad.8@20249.07,12271.11 pad.8@20251.25,8218.1 pad.8@20251.25,12164.1 pad.8@20264.5,8271.9 pad.8@20264.5,12217.9 PJ2.2 PJ2.22 Q2.2 Q4.2 Q5.2 Q6.2 R7.1 R9.1 R10.1 R12.1 R19.1 R20.1 R51.1 R109.2 R126.2 R127.2 R128.1 R129.1 SW1.2 SW1.S1 SW2.2 SW2.S1 SW3.2 SW3.S1 SW4.2 SW4.S2 SW5.2 SW5.S2 SW6.2 SW6.S2 SW7.2 SW7.S2 SW8.2 SW8.S2 TP14.1 TP16.1 U1.6 U1.12 U1.28 U1.41 U1.46 U1.52 U1.54 U2.6 U2.12 U2.28 U2.41 U2.46 U2.52 U2.54 U3.6 U3.12 U3.28 U3.41 U3.46 U3.52 U3.54 U4.6 U4.12 U4.28 U4.41 U4.46 U4.52 U4.54 U5.3 U6.5 U7.3 Y1.2 Y1.4 Y2.2 Y2.4 | length 14965
  Top Layer 1 w5: C77_IC105.2@13240.16,9978.82 C79_IC105.2@13240.16,10048.82 ; v1(14461.48,10078.26) 14461.48,10111.48 ; v1(14506.48,10525.26) 14539.63,10525.26 C8.1@14540.26,10524.63 ; C6.1@14548.41,10649.63 v1(14548.41,10695.47) Y2.2@14548.41,10741.32 ; Y2.4@14611.41,10827.94 14616.41,10832.94 14616.11,10833.23 v1(14616.11,10876.28) ; v1@14616.41,10876.28 C4.1@14616.41,10919.63 ; C23.2@14631.48,11017.58 v1(14631.48,11055.26) ; v1(14639.91,10509.97) C22.2@14639.91,10542.14 ; v1(14659.99,10934.67) 14660.41,10934.26 14706.74,10934.26 IC2.16@14707.15,10933.84 ; v1(14676.48,9631.26) 14685.21,9639.98 C47.2@14709.85,9639.98 ; v1(14698.37,12004.72) 14698.37,12076.56 C87.1@14700,12078.19 ; U3.28@14702.9,9789.27 U3.28@14710.4,9781.77 ; IC2.31@14707.15,10638.57 14707.31,10638.41 14748.42,10638.41 14760.1,10626.73 v1(14760.1,10624.81) ; C60.2@14709.85,10324.63 14710.16,10324.32 v1(14710.16,10294.12) ; v1@14710.4,9833.24 U3.28@14710.4,9781.77 ; C24.2@14749.75,11386.87 14750.16,11386.47 v1(14750.16,11338.03) ; IC2.38@14805.11,10461.87 14805.11,10424.83 14799.91,10419.63 14799.91,10404.27 C29.2@14795.26,10399.63 14795.26,10379.48 v1(14809.48,10365.26) ; R12.1@14911.34,9658.48 R12.1@14912.49,9659.63 ; v1@15052,10367.54 15057.59,10373.13 C30.2@15057.59,10396.24 ; C30.2@15057.59,10399.63 15061.01,10403.05 IC2.51@15061.01,10461.87 ; C25.2@15069.04,11386.87 15061.01,11378.84 IC2.130@15061.01,11307.38 15061.01,11271.73 v1(15074.48,11258.26) ; R9.1@15074.85,9659.63 15079.85,9654.63 v1(15109.85,9654.63) 15124.5,9639.98 C48.2@15139.85,9639.98 ; C59.2@15114.85,10324.63 15119.6,10319.87 v1(15119.6,10294.12) ; U3.41@15119.85,9771.4 v1@15119.85,9833.24 ; C58.2@15165.2,10324.63 15165.2,10339.73 15182.49,10357.01 v1(15183.58,10357.01) ; v1@15182.84,10170.19 U3.12@15182.84,10232.03 ; v1(15183.24,9708.66) 15199.85,9692.06 C49.2@15199.85,9674.63 ; v1(15196.48,10386.26) 15198.48,10386.26 15211.85,10399.63 C31.2@15252.59,10399.63 15257.86,10404.9 IC2.61@15257.86,10461.87 ; v1(15249.85,9639.63) 15279.5,9639.63 C50.2@15279.85,9639.98 ; IC2.120@15257.86,11307.38 15257.86,11380.69 C26.2@15264.04,11386.87 15295.1,11386.87 v1(15305.48,11397.26) ; v1(15276.67,10294.63) 15284.85,10302.81 C57.2@15284.85,10324.63 ; U3.46@15277.33,9771.4 v1@15277.33,9833.24 ; v1(15371.57,9709.31) 15371.57,9677.9 C51.2@15374.85,9674.63 ; v1@15371.82,10170.19 U3.6@15371.82,10232.03 ; v1(15434.85,9639.63) 15469.5,9639.63 C52.2@15469.85,9639.98 ; C55.2@15444.85,10324.63 15452.71,10316.77 15452.71,10307.47 v1(15466.06,10294.12) ; U3.52@15466.31,9771.4 v1@15466.31,9833.24 ; v1(15504.85,9639.63) 15534.89,9639.63 C53.2@15535.24,9639.98 ; v1(15529.05,10294.12) 15529.05,10323.83 C54.2@15529.85,10324.63 ; U3.54@15529.3,9771.4 U3.54@15529.3,9771.46 v1@15529.3,9833.24 ; IC2.83@15552.67,10736.99 C32.2@15612.9,10736.99 ; IC2.94@15552.67,10953.53 15552.8,10953.39 15607.35,10953.39 v1(15607.48,10953.26) ; IC2.107@15552.67,11209.43 15609.71,11209.43 C27.2@15614.91,11214.63 15615.7,11214.63 15642.33,11241.26 15645.48,11241.26 v1(15646.48,11242.26) ; v1(15560.28,10494.98) C28.2@15584.55,10494.98 ; v1(15595.66,10355.38) C10.1@15595.66,10398.88 ; C32.2@15620.89,10730.01 15622.25,10731.37 v1(15649.84,10731.37) ; v1(15676.48,11085.26) C2.2@15676.48,11128.76 ; C7.1@15848.5,10528.82 15850.83,10526.5 15850.2,10525.86 v1(15850.2,10504.19) ; C5.1@15856.65,10653.82 v1(15856.65,10699.66) Y1.2@15856.65,10745.51 ; v1(15858.15,10983.82) C12.2@15893.5,10983.82 ; Y1.4@15919.65,10832.13 15924.65,10837.13 v1(15924.65,10880.47) C3.1@15924.65,10923.82 ; v1@15925.24,9847.2 v1(15930.24,9847.2) ; v1(15948.37,10513.6) 15948.37,10546.55 C13.2@15948.6,10546.77 ; v1(15968.15,10938.82) 15968.94,10938.03 IC1.16@16015.39,10938.03 ; U1.28@16011.2,9793.46 U1.28@16018.7,9785.96 ; IC1.31@16015.39,10642.76 16015.93,10643.29 16078.26,10643.29 v1(16078.79,10643.82) ; v1(16017.02,11388.21) 16017.63,11388.82 C11.2@16050.83,11388.82 ; C33.2@16018.15,9644.17 16018.5,9643.82 16041.76,9643.82 v1(16053.02,9632.56) ; C40.2@16018.15,10328.82 16018.46,10328.51 v1(16018.46,10298.31) ; v1@16018.7,9837.43 U1.28@16018.7,9785.96 ; v1(16035,11856.18) C71.1@16035,11903.19 ; IC1.38@16113.35,10466.06 16113.35,10429.01 16108.15,10423.82 16108.15,10408.46 C21.2@16103.5,10403.82 16103.5,10378.94 v1(16114.37,10368.07) ; J8.2@16213.15,11416.38 16252.5,11416.38 v1(16252.73,11416.61) ; v1@16218.15,9628.82 v1(16218.15,9632.56) 16218.15,9661.18 R10.1@16220.79,9663.82 ; v1(16360.24,10372.2) 16360.24,10375.11 16365.83,10380.7 C20.2@16365.83,10403.82 16369.25,10407.24 IC1.51@16369.25,10466.06 ; IC1.130@16369.25,11311.57 16369.25,11395.27 C14.2@16372.8,11398.82 ; C14.2@16375.47,11388.82 16378.76,11392.1 16408.4,11392.1 v1(16409.27,11391.23) ; R7.1@16383.15,9663.82 16388.15,9658.82 v1(16418.15,9658.82) 16432.8,9644.17 C34.2@16448.15,9644.17 ; C41.2@16423.15,10328.82 16427.9,10324.06 v1(16427.9,10298.31) ; U1.41@16428.15,9775.59 v1@16428.15,9837.43 ; C46.2@16473.5,10328.82 16473.5,10343.92 16490.79,10361.2 v1(16491.88,10361.2) ; v1@16491.14,10174.38 U1.12@16491.14,10236.22 ; v1(16491.54,9712.85) 16508.15,9696.25 C35.2@16508.15,9678.82 ; v1@16495.24,10072.2 v1(16500.24,10077.2) ; v1(16505.24,10392.2) 16516.85,10403.82 C19.2@16558.4,10403.82 ; v1(16558.15,9643.82) 16587.8,9643.82 C36.2@16588.15,9644.17 ; C19.2@16560.83,10403.82 16566.1,10409.09 IC1.61@16566.1,10466.06 ; IC1.120@16566.1,11311.57 16566.1,11392.13 C15.2@16572.8,11398.82 ; C15.2@16575.47,11388.82 16576.57,11389.92 v1(16610.29,11389.92) ; v1(16584.97,10298.82) 16593.15,10307 C42.2@16593.15,10328.82 ; U1.46@16585.63,9775.59 v1@16585.63,9837.43 ; v1(16679.87,9713.5) 16679.87,9682.09 C37.2@16683.15,9678.82 ; v1(16679.87,10174.13) U1.6@16679.87,10235.97 ; v1@16680.12,10174.38 U1.6@16680.12,10236.22 ; v1@16680.36,10174.62 U1.6@16680.36,10236.46 ; v1@16680.61,10174.38 U1.6@16680.61,10271.22 ; C43.2@16702.8,10328.82 16702.8,10343.46 v1(16718.15,10358.82) ; v1(16743.15,9643.82) 16777.8,9643.82 C38.2@16778.15,9644.17 ; C44.2@16753.15,10328.82 16761.01,10320.96 16761.01,10311.66 v1(16774.36,10298.31) ; U1.52@16774.36,9775.4 v1@16774.36,9837.68 ; U1.52@16774.61,9775.59 v1@16774.61,9837.43 ; U1.52@16774.85,9775.83 v1(16774.85,9837.68) ; U1.52@16775.1,9740.59 v1@16775.1,9837.43 ; 16791.24,10382.2 16798.56,10374.88 16798.56,10373.15 16807.51,10364.2 16814.24,10364.2 ; v1(16800.53,11224.53) 16801.67,11224.53 16811.97,11214.22 16860.31,11214.22 IC1.107@16860.91,11213.62 16917.95,11213.62 C16.2@16923.15,11218.82 ; v1(16813.15,9643.82) 16843.19,9643.82 C39.2@16843.54,9644.17 ; v1(16837.35,10298.31) 16837.35,10328.02 C45.2@16838.15,10328.82 ; U1.54@16837.6,9775.59 v1@16837.6,9837.43 ; IC1.83@16860.91,10741.18 16921.14,10741.18 C17.2@16928.15,10734.17 16930.75,10736.78 v1(16959.55,10736.78) 16959.98,10737.2 v1@16960.24,10737.2 ; IC1.94@16860.91,10957.72 16862.24,10956.38 16894.51,10956.38 v1@16907.52,10943.37 ; v1(16864.86,10487.58) 16876.09,10498.82 16892.8,10498.82 C18.2@16893.15,10498.46 ; C9.1@16894.65,10403.82 16914.59,10423.76 v1(16941.67,10423.76) ; v1(16929.46,11287.1) 16966.36,11287.1 C1.2@16983.15,11270.31 C1.2@16991.3,11262.16 ; IC7.7@17035.24,9770.43 v1(17035.24,9817.2) ; C63.1@17083.1,11138.84 v1(17129.81,11138.84) ; J5.3@17130.24,9737.09 17130.24,9680.2 17148.23,9662.2 17151.23,9665.2 v1(17192.24,9665.2) ; v1(17244.36,11260.34) 17244.96,11260.94 IC4.3@17274.13,11260.94 ; v1(17251.31,11076.73) C61.2@17283.54,11076.73 ; IC4.1@17348.94,11260.94 17352.38,11264.39 17381.29,11264.39 17383.79,11261.89 17398.79,11261.89 v1(17399.16,11261.52) ; v1(17662.65,11277.91) 17674.31,11289.57 17703.46,11289.57 C76.1@17716.5,11302.6 ; C77_IC101.2@18909.72,11502.52 18909.72,11530.49 ; C77_IC103.2@18962.01,9913.82 C79_IC103.2@18962.01,9983.82 ; C88.1@18991.1,12883.31 18990.73,12883.68 18990.73,12928.69 v1(18992.61,12930.57) ; D4.2@20001.34,13200 20001.34,13158.66 v1(20010,13150) ; C77_IC104.2@20249.29,9913.82 C79_IC104.2@20249.29,9983.82 ; C77_IC102.2@20249.29,11513.82 C79_IC102.2@20249.29,11583.82 ; U3.28@14710.4,9781.77 U3.28@14710.4,9771.46 14710.4,9771.4 U3.28@14710.4,9781.77 ; U1.28@16018.7,9785.96 U1.28@16018.7,9775.59 U1.28@16018.7,9785.96
  Top Layer 1 w8: v1@13200.91,9793.82 C78_IC105.2@13245.08,9793.82 ; v1@13200.91,9978.82 C77_IC105.2@13245.08,9978.82 ; v1@13596.26,10108.82 IC11_IC105.7@13640.43,10108.82 ; C86.1@14491.22,11378.82 v1@14535.39,11378.82 ; IC8.7@14511.48,9768.49 14511.48,9725.48 v1(14523.15,9713.82) 14533.15,9703.82 C64.1@14533.15,9668.82 ; v1@14643.15,11343.47 R109.2@14643.15,11387.64 ; IC22.1@14790,11794.64 14790,11793.43 14806.16,11777.27 14832.36,11777.27 v1(14832.51,11777.42) ; C75.1@14907.01,11696.18 v1@14907.01,11740.35 ; C80.2@15348.15,11905 v1(15390,11905) ; U6.5@15589.96,12400 15611.6,12378.36 v1(15611.6,12355.97) ; v3(16125.47,11605.47) IC9.1@16125.47,11666.18 ; v1@16188.29,8241.18 C85.1@16188.29,8285.36 ; C72.1@16395.61,11736.5 v1@16395.61,11780.67 ; U7.3@16457.4,11915 16457.4,11903.77 16464.88,11896.3 16473.63,11896.3 16477.53,11892.4 v1(16479.63,11892.4) v1@16480,11892.03 ; v1(16594.8,11875.2) U5.3@16594.8,11915 ; v1(17469.41,11310.59) IC10.1@17469.41,11353.82 ; v1(17683.15,11436.02) 17683.15,11436.65 17706.44,11459.94 17706.44,11461.91 17728.03,11483.5 C74.1@17730,11483.5 ; v1(18873.11,11493.88) 18901.09,11493.88 C77_IC101.2@18909.72,11502.52 ; 18909.72,11530.49 18909.72,11558.9 C79_IC101.2@18914.65,11563.82 ; v1(18914.65,11263.82) C78_IC101.2@18914.65,11308.82 ; v1(18920,10603.82) 18920.16,10603.66 IC14.10@18964.33,10603.66 ; v1(18945.5,9875.67) 18956.65,9886.82 18956.65,9903.54 C77_IC103.2@18966.93,9913.82 ; v1@18966.93,9684.65 C78_IC103.2@18966.93,9728.82 ; IC14.19@19195.67,10808.38 19195.89,10808.6 19245.38,10808.6 v1(19245.47,10808.7) ; v1(19281,10549) J12.2@19338.32,10549 J12.4@19338.32,10499 J12.6@19338.32,10449 J12.8@19338.32,10399 J12.7@19503.68,10399 J12.5@19503.68,10449 J12.3@19503.68,10499 J12.1@19503.68,10549 ; IC11_IC101.7@19310,11623.82 v1(19355,11623.82) ; IC11_IC103.7@19325,10043.82 v1@19325,10087.99 ; C73.1@19345,10823.82 v1(19345,10868.82) ; v1@20205.12,11513.82 C77_IC102.2@20249.29,11513.82 ; v1@20210.04,11328.82 C78_IC102.2@20254.21,11328.82 ; v1@20220.83,9983.82 C79_IC104.2@20265,9983.82 ; v1@20254.21,9684.65 C78_IC104.2@20254.21,9728.82 ; IC17.15@20350,10423.82 v1@20350,10467.99 ; IC16.15@20350,10806.1 20351.84,10804.27 20351.84,10768.28 v1(20373.08,10747.04) ; v1@20350,11129.65 IC15.15@20350,11173.82 ; IC11_IC104.7@20649.57,10043.82 v1@20693.74,10043.82 ; IC11_IC102.7@20649.57,11643.82 v1@20693.74,11643.82 ; IC17.8@20650,10211.53 v1@20650,10255.71 ; IC16.8@20650,10591.53 v1@20694.17,10591.53 ; IC15.8@20650,10959.25 v1@20694.17,10959.25
  Top Layer 1 w10: v1(14358.32,12126.42) J10.8@14358.32,12190.6 ; v1(14408.32,12126.42) J10.6@14408.32,12190.6 ; v1(14458.32,12126.42) J10.4@14458.32,12190.6 ; IC18.1@15399.63,11972.31 15400.27,11971.67 v1(15437.29,11971.67) 15437.93,11972.31 IC19.3@15476.2,11972.31 ; IC18.3@15399.63,12047.11 15399.84,12047.32 v1(15438.73,12047.32) 15438.93,12047.11 IC19.1@15476.2,12047.11 ; v1(15565.57,9073.5) SW4.2@15602.44,9073.5 ; v1(15595.04,12014.29) 15595.17,12014.16 C81.2@15641.2,12014.16 ; v1(16812.25,9073.5) SW5.2@16849.12,9073.5 ; v1(18184.11,10109.26) SW7.2@18184.11,10146.13 ; v1(18184.11,11091.85) SW6.2@18184.11,11128.72 ; v1(18277.32,9073.5) SW8.2@18317.71,9073.5 ; D5.2@18552.68,13200 18557.68,13205 v1(18595,13205) ; v1(19259.81,12600.13) C89.1@19259.81,12637 ; v1(19339.81,12600.13) C91.1@19339.81,12637 ; v1(19481.11,9048.93) SW1.2@19507.18,9075 ; v2(19600.08,12616.31) 19600.88,12617.12 19637.12,12617.12 C69.1@19650,12630 ; v1(20298.76,9073.5) SW2.2@20335.64,9073.5 ; C92.1@20361.14,12650 C92.1@20361.49,12649.65 ; C92.1@20361.14,12650.98 v1(20361.14,12694.49) ; C97.1@20384.65,13092.99 v2(20384.65,13150) ; v2(20491.54,12780) C95.1@20541.65,12780 ; R19.1@20580.83,12710 R19.1@20582.1,12708.73 v2(20622.34,12708.73) ; C94.1@20857.64,12780 v2(20904.65,12780) ; C93.1@20857.64,12860 v2(20892.09,12860) ; C96.1@20857.64,13160 v2(20904.65,13160) ; v2(20859.65,12940) 20859.65,12965 IC23.9@20889.65,12995 ; v2(20874.02,12639.37) R51.1@20922.83,12639.37 ; v2(20874.65,13080) 20874.65,13040 IC23.9@20904.65,13010 ; v2(20889.65,12940) IC23.9@20889.65,12995 ; v2(20904.65,13080) IC23.9@20904.65,13010 ; v2(20919.65,12940) 20919.65,12980 20927.15,12987.5 20949.65,12965 v2(20949.65,12940) ; v2(20934.65,13080) 20934.65,13040 IC23.9@20904.65,13010 ; v1(21000,12128.13) J11.8@21000,12165 ; J11.7@21000,12365 v1(21000,12401.87) ; v1(21050,12128.13) J11.6@21050,12165 ; J11.5@21050,12365 v1(21050,12401.87) ; v1(21100,12128.13) J11.4@21100,12165 ; J11.3@21100,12365 v1(21100,12401.87) ; v1(21125.53,9073.5) SW3.2@21162.41,9073.5 ; v1(21150,12128.13) J11.2@21150,12165 ; J11.1@21150,12365 v1(21150,12401.87) ; R126.2@21155.83,12930 v2(21194.65,12930) 21210.21,12914.44 v2(21210.21,12837.57) ; R128.1@21155.83,13100 21156.51,13099.31 v2(21194.06,13099.31) ; R127.2@21158.72,13042.5 v2(21197.54,13042.5) ; Q4.2@21191.42,12710 21192.05,12709.37 v2(21234.02,12709.37) ; R129.1@21315.83,13040 21323.64,13032.19 v2(21362.46,13032.19) ; Q5.2@21377.24,13098.74 21378.5,13100 v2(21412.52,13100) ; Q6.2@21452.05,12881.26 21454.65,12883.86 v2(21454.65,12930) ; IC23.9@20889.65,12995 IC23.9@20904.65,13010
  Top Layer 1 w20: C70.1@19249.81,13157.99 v2(19299.81,13157.99) ; v2(19467.8,12804.4) 19543.5,12804.4 19560.01,12787.89 19560.01,12749.74 19542.4,12732.13 19524.79,12732.13 v2(19523.34,12730.68)
  Layer 3 w8: 15823.15,10138.82 15823.15,10145.75 15813.32,10155.58 15813.32,10530.7 15833.7,10551.08 15833.7,10588.82
  Bottom 6+gnd w5: U4.28@14710.4,10232.03 v1@14710.4,10293.87 ; v1(15119.6,10294.12) 15119.6,10308.38 15121.48,10310.26 ; U4.41@15119.85,10232.03 v1@15119.85,10293.87 ; U4.12@15182.84,9771.4 15183.24,9771 v1(15183.24,9708.66) ; v1(15276.67,10294.63) 15276.67,10232.69 U4.46@15277.33,10232.03 ; v1@15371.82,9709.56 U4.6@15371.82,9771.4 ; U4.52@15466.31,10232.03 U4.52@15466.31,10232.09 v1@15466.31,10293.87 ; U4.54@15529.3,10232.03 U4.54@15529.3,10232.09 v1@15529.3,10293.87 ; v1(15772.32,8261.31) 15772.32,8276.85 15772.44,8276.97 J3.1@15772.44,8328.82 ; 15834.57,10091.84 15872.27,10101.06 ; 15840.24,10057.2 15880.24,10072.2 ; 15855.63,10029.28 15870.69,10035.41 ccw(c15864.89,10049.65) 15871.42,10035.73 15885.24,10042.2 ; 15872.87,9996.4 15883.49,10007.41 cw(c15894.55,9996.73) 15883.68,10007.61 15884.26,10008.18 ; 15900.24,10027.2 15885.19,10009.19 ; U2.28@16018.7,10236.22 v1@16018.7,10298.06 ; U2.41@16428.15,10236.22 v1@16428.15,10298.06 ; U2.12@16491.14,9775.59 16491.54,9775.19 v1(16491.54,9712.85) ; v1(16584.97,10298.82) 16584.97,10236.88 U2.46@16585.63,10236.22 ; v1@16680.12,9713.75 U2.6@16680.12,9775.59 ; U2.52@16774.61,10236.22 v1@16774.61,10298.06 ; U2.54@16837.6,10236.22 v1@16837.6,10298.06 ; v1(17649.57,11295.71) 17650.63,11296.77 17752.09,11296.77 H3.43@17753.15,11297.83 ; v1@17662.41,11277.67 17662.89,11278.15 H3.42@17753.15,11278.15 ; v1(17664.27,11318.02) 17664.52,11317.77 17752.9,11317.77 H3.44@17753.15,11317.52 ; v1(17672.07,10501.81) 17672.07,10499.9 v1@17673.15,10498.82 ; v1(17673.52,10523.98) 17687.06,10510.43 H3.3@17753.15,10510.43 H3.3@17753.93,10511.21 ; v1(17675.26,10608.09) 17675.65,10608.47 17752.77,10608.47 H3.8@17753.15,10608.86 ; v1(17683.15,11436.02) 17683.53,11435.63 H3.50@17753.15,11435.63 ; H3.1@17753.15,10471.06 17680.9,10471.06 17673.15,10478.82 v1@17673.15,10498.82 ; H3.2@17753.77,10491.37 H3.2@17753.15,10490.75 17681.22,10490.75 v1@17673.15,10498.82 ; 15884.26,10008.18 ccw(c15873.39,10019.05) 15885.19,10009.19 ; 15884.26,10008.18 ccw(c15873.39,10019.05) 15885.19,10009.19 ; 15884.26,10008.18 ccw(c15873.39,10019.05) 15885.19,10009.19 ; 15884.26,10008.18 ccw(c15873.39,10019.05) 15885.19,10009.19 ; 15884.26,10008.18 ccw(c15873.39,10019.05) 15885.19,10009.19 ; 15884.26,10008.18 ccw(c15873.39,10019.05) 15885.19,10009.19 ; 15884.26,10008.18 ccw(c15873.39,10019.05) 15885.19,10009.19 ; 15884.26,10008.18 ccw(c15873.39,10019.05) 15885.19,10009.19 ; 15884.26,10008.18 ccw(c15873.39,10019.05) 15885.19,10009.19 ; 15884.26,10008.18 ccw(c15873.39,10019.05) 15885.19,10009.19 ; 15884.26,10008.18 ccw(c15873.39,10019.05) 15885.19,10009.19 ; 15884.26,10008.18 ccw(c15873.39,10019.05) 15885.19,10009.19 ; 15884.26,10008.18 ccw(c15873.39,10019.05) 15885.19,10009.19 ; 15884.26,10008.18 ccw(c15873.39,10019.05) 15885.19,10009.19 ; 15884.26,10008.18 ccw(c15873.39,10019.05) 15885.19,10009.19 ; 15884.26,10008.18 ccw(c15873.39,10019.05) 15885.19,10009.19
  Bottom 6+gnd w8: J1.59@15571.97,12302.36 v1(15571.97,12355) 15571.97,12390.39 15569.35,12393.01 15569.35,12406.99 15571.97,12409.61 J1.60@15571.97,12450 ; J1.57@15611.34,12302.36 15611.34,12355.71 v1(15611.6,12355.97) 15611.34,12356.23 J1.58@15611.34,12450 ; J1.55@15650.71,12302.36 v1(15650.71,12376.18) J1.56@15650.71,12450 ; J1.53@15690.08,12302.36 v1(15690.08,12376.18) J1.54@15690.08,12450 ; J1.51@15729.45,12302.36 v1(15729.45,12376.18) J1.52@15729.45,12450
  Bottom 6+gnd w10: v2(21194.06,13099.31) 21194.06,13169.42 21204.65,13180 21332.52,13180 v2(21412.52,13100) ; v2(21362.46,13032.19) 21411.49,13081.22 21411.49,13098.97 v2(21412.52,13100) ; v2(21454.65,12930) 21412.52,12972.13 v2(21412.52,13100)
  other v1: 16188.13,8241.03 18966.77,9684.49 20254.06,9684.49 13200.75,9793.98 16903.52,9812.2 14710.65,9833.49 15120.09,9833.49 15277.57,9833.49 15466.55,9833.49 15529.54,9833.49 16018.95,9837.68 16428.39,9837.68 16585.87,9837.68 16837.84,9837.68 16025.24,9872.2 15890.24,9907.2 16025.24,9912.2 16899.82,9976.53 13200.75,9978.98 15855.24,9982.2 20220.67,9983.98 15835.24,10032.2 20693.9,10043.66 16025.24,10072.2 16595.24,10072.2 16690.24,10072.2 16430.24,10077.2 16780.24,10077.2 16841.16,10080.26 19325.16,10088.15 13596.1,10108.98 16025.24,10127.2 15182.6,10169.94 15371.57,10169.94 16490.9,10174.13 20650.16,10255.86 15052,10364.63 20350.16,10468.15 20694.33,10591.38 16658.99,10605.43 16194.46,10620.38 15458.15,10648.82 14903.15,10673.82 16724.81,10838.82 15418.15,10933.82 16907.52,10943.24 15333.15,10943.82 20694.33,10959.09 15418.15,10983.82 15333.15,10998.82 14893.15,11018.82 15889.86,11023.77 20349.84,11129.49 14893.15,11138.82 15433.15,11158.82 16252.71,11169.26 16633.15,11195.74 15850.24,11272.2 20209.88,11328.98 14642.99,11343.31 14535.55,11378.66 20204.96,11513.98 20693.9,11643.66 14907.17,11740.51 16395.77,11780.83
  other v2: 19488.62,12720.72
GND_A: J4.2 J4.4 J4.11 J4.12 PJ1.2 PJ1.22 | length 2139.1
  Unused w5: v1(14561.41,12948.59) PJ1.22@14786.24,12948.59 ; PJ1.22@14758.68,12968.45 PJ1.2@14758.68,13076.5
  Layer 3 w20: v1(14561.41,12948.59) 14561.41,12511.41 14535,12485 14535,12065 v1(14525,12055) 14525,11800 14625,11700 v1(14720,11700)
  Bottom 6+gnd w10: J4.11@14630,12053.7 14688.7,12053.7 14728.07,12093.07 J4.12@14777.64,12093.07 ; J4.2@14777.64,11699.37 J4.4@14777.64,11778.11
  Bottom 6+gnd w20: v1(14525,12055) 14526.3,12053.7 J4.11@14630,12053.7 ; v1(14720,11700) 14777.01,11700 J4.2@14777.64,11699.37
GPIO_GUI.LED1_1: IC1.43 J10.1 | length 4468.8
  Top Layer 1 w5: J10.1@14508.32,12344.14 14510,12345.82 v1(14510,12420) ; IC1.43@16211.77,10466.06 v1(16211.79,10513.73)
  Unused w5: v1(14510,12420) 14510,12232.07 ccw(c14515,12232.07) 14511.45,12228.55 14698.37,12041.63 14743.37,12041.63 14825,11960 15222.35,11960 15247.94,11985.59 15365.3,11985.59 15365.33,11985.55 15365.89,11985.55 15367.96,11985.55 15369.43,11987.02 15370.75,11988.34 15370.75,11989.36 15381.59,12033.64 cw(c15386.45,12032.46) 15382.91,12036 15418.12,12071.21 cw(c15421.67,12067.69) 15421.67,12072.69 15600.34,12072.69 cw(c15600.34,12067.69) 15603.86,12071.24 15638.65,12036.45 ccw(c15642.17,12040) 15642.17,12035 15808.2,12035 cw(c15808.2,12030) 15810.82,12034.26 15816.52,12030.73 15819.79,12028.7 ccw(c15822.42,12032.96) 15820.66,12028.28 ccw(c15825,12040) 15825,12027.5 15920.28,12027.5 ccw(c15920.28,12040) 15929.14,12031.18 15931.51,12033.55 cw(c15935.03,12030) 15935.03,12035 15991.19,12035 ccw(c15991.19,12040) 15994.71,12036.45 15997.18,12038.92 cw(c16000.7,12035.37) 16000.7,12040.37 16009.3,12040.37 cw(c16009.3,12035.37) 16012.82,12038.92 16020.3,12031.44 ccw(c16023.81,12035) 16023.81,12030 v1(16040,12030) ; v1(15793.05,10275.98) 15793.05,10294.97 cw(c15798.05,10294.97) 15794.5,10298.49 15823.56,10327.55 cw(c15827.08,10324) 15827.08,10329 15894.95,10329 ccw(c15894.95,10334) 15898.47,10330.45 16087.52,10519.49 cw(c16091.04,10515.94) 16091.04,10520.94 16172.38,10520.94 ccw(c16172.38,10525.94) 16175.9,10522.39 16178.38,10524.87 cw(c16181.9,10521.31) 16181.9,10526.31 16190.49,10526.31 cw(c16190.49,10521.31) 16194.01,10524.87 16201.65,10517.23 ccw(c16205.17,10520.79) 16203.81,10515.97 v1(16211.79,10513.73)
  Layer 3 w5: v1(15793.05,10275.98) 15793.05,10356.61 15763.84,10385.82 15763.84,10401.55 15782.29,10420 15792.07,10420 15795,10422.93 15795,11415.15 15990,11610.15 15990,11980 v1(16040,12030)